# Altium PCB dimmer.PcbDoc
Units mm, origin at the board's own origin, x right, y up, seen from the top; angles counter-clockwise.
Board outline 32.8 x 86.9 mm, 4 copper layers (Top Layer, Layer 2, Layer 3, Bottom Layer), stack 1.369 mm thick; 54 components, 46 nets, 141 pads, 27 vias.
Unrouted connection lines stored in the file: 68.
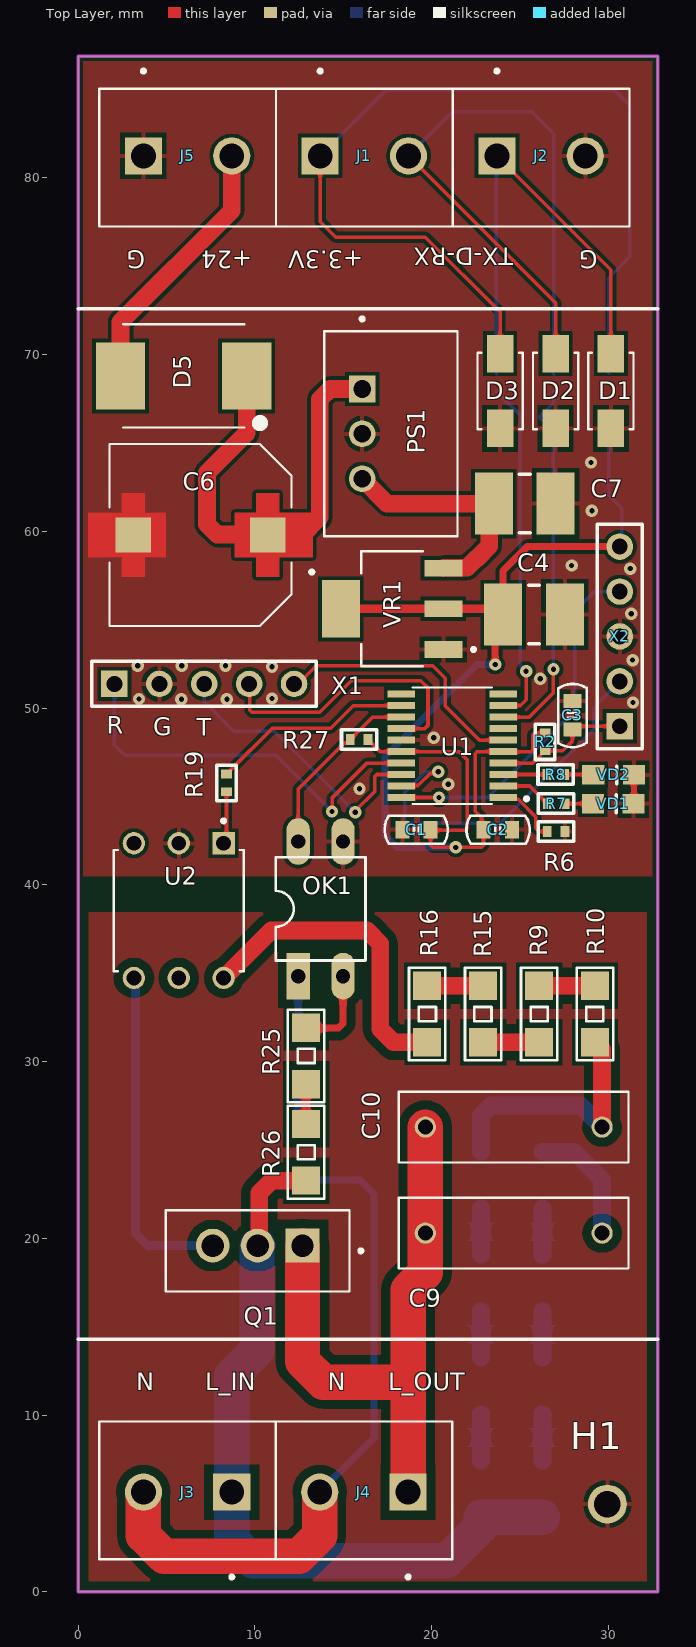
[diagram p0: Top Layer view]
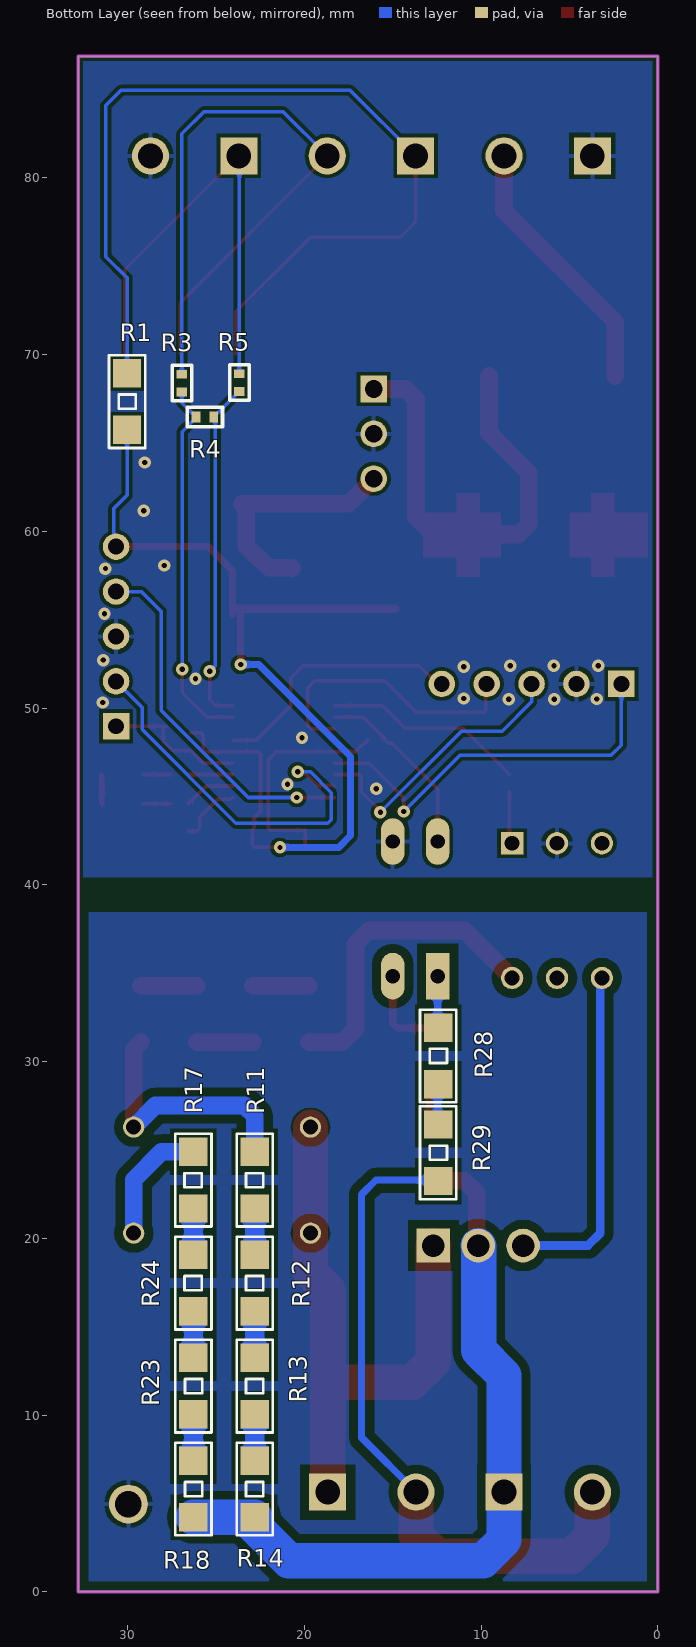
[diagram p1: Bottom Layer view, seen from below]
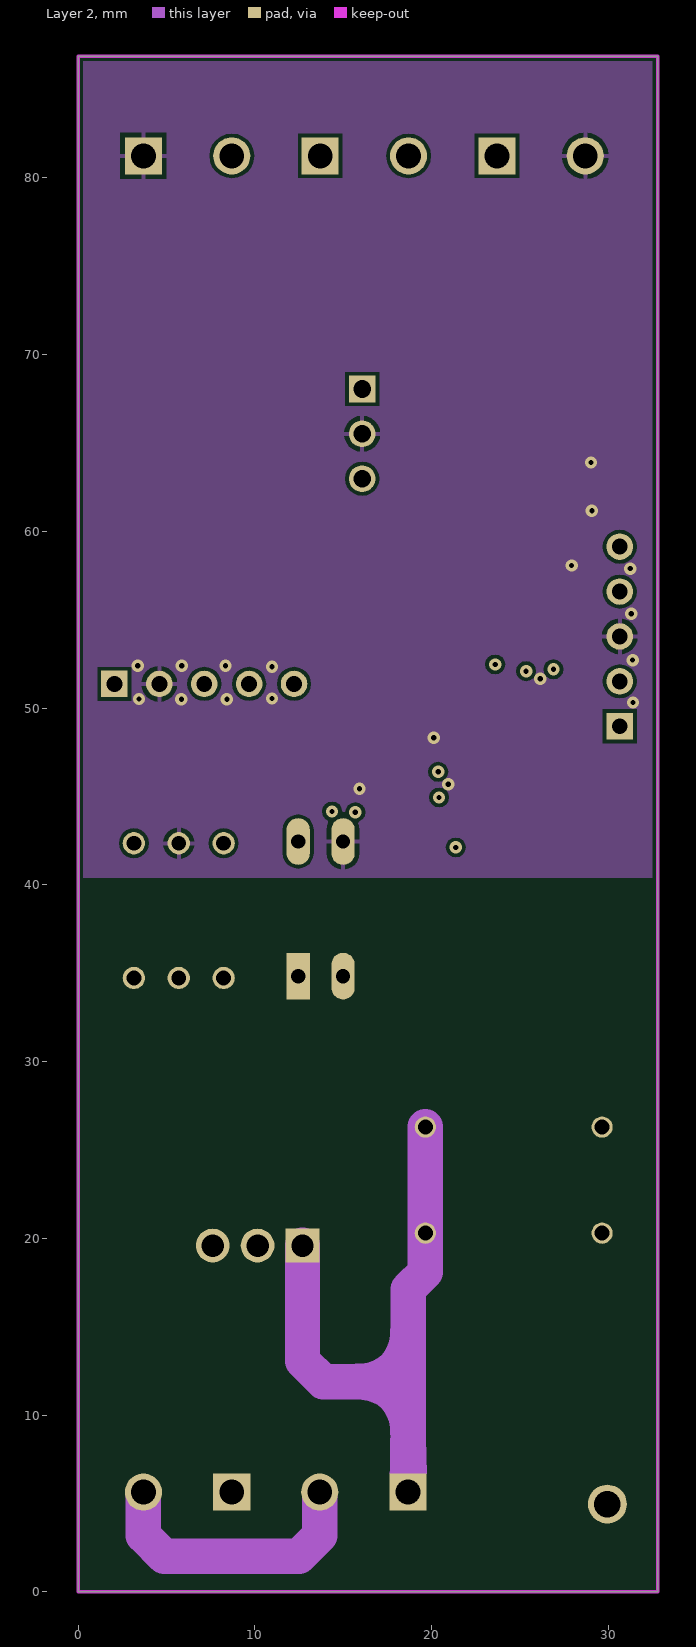
[diagram p2: Layer 2]
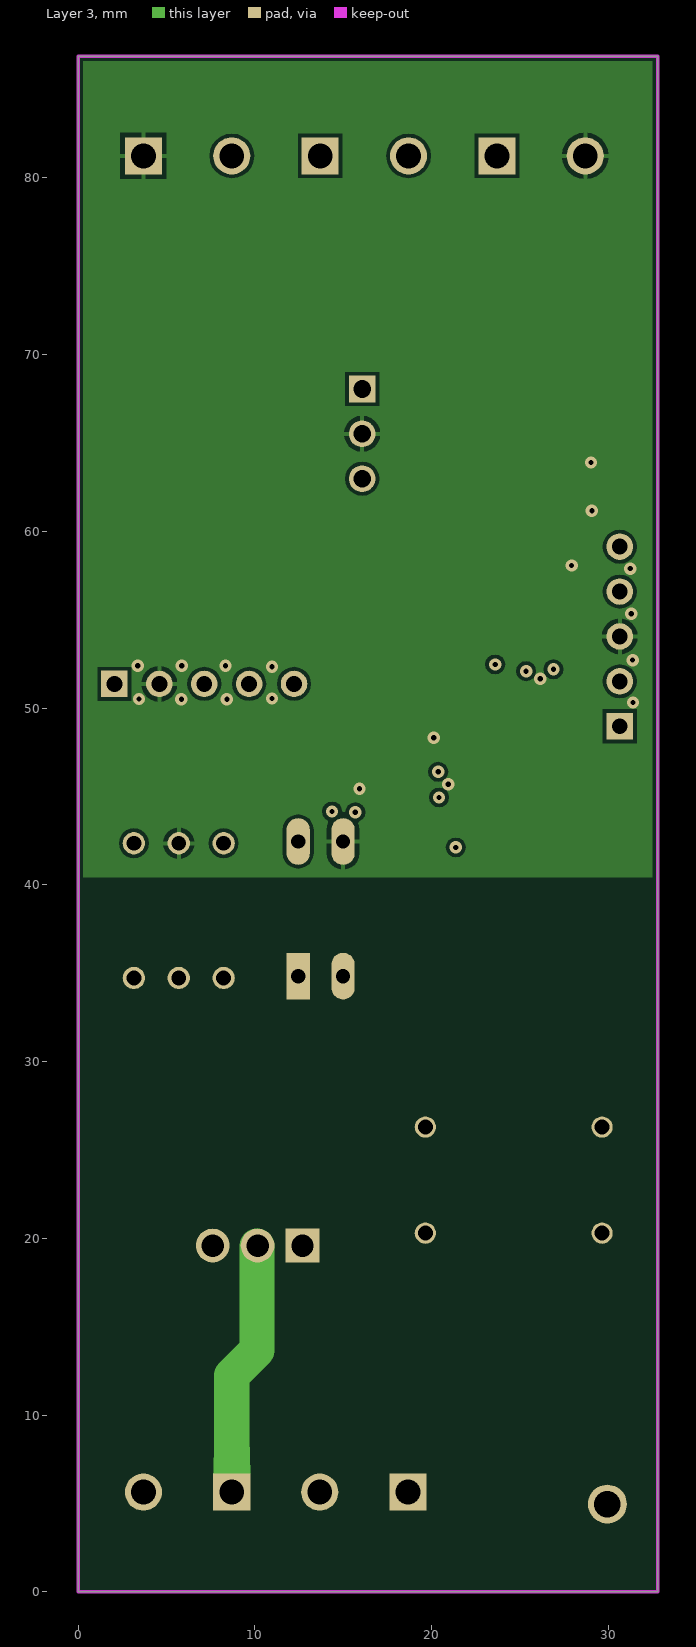
[diagram p3: Layer 3]

## Layer stack, top to bottom
Top Solder: solder mask 0.0254, SM-001, Dk 4
Top Layer: signal copper 0.035
Dielectric 1: prepreg 0.1295, PP-017, Dk 4.3
Dielectric 2: prepreg 0.1295, PP-017, Dk 4.3
Layer 2: signal copper 0.035
Dielectric 3: core 0.7112, Core-039, Dk 4.8
Layer 3: signal copper 0.035
Dielectric 4: prepreg 0.1295, PP-017, Dk 4.3
Dielectric 5: prepreg 0.1295, PP-017, Dk 4.3
Bottom Layer: signal copper 0.035
Bottom Solder: solder mask 0.0254, SM-001, Dk 4

## Board outline
0,0 0,86.9 32.8,86.9 32.8,0

## Design rules (kind name [scope] priority, off if disabled: settings)
Clearance Clearance_1 [InNet('pwr_gnd')] p1: gap=0.5 ignorepadtopadclearanceinfootprint=FALSE
Clearance [All] p2: gap=0.2 ignorepadtopadclearanceinfootprint=FALSE
ComponentClearance [InComponentClass('J*') vs InComponentClass('J*')] p1: gap=0.01 collisioncheckmode=3 verticalgap=0.01 showdistances=FALSE
DiffPairsRouting [All] p1: maxlimit=0.254 minlimit=0.2 mostfreqgap=0.254 toplayer_minwidth=0.25 toplayer_maxwidth=0.381 toplayer_prefwidth=0.381 midlayer1_minwidth=0.25 midlayer1_maxwidth=0.381 midlayer1_prefwidth=0.381 midlayer2_minwidth=0.25 midlayer2_maxwidth=0.381 midlayer2_prefwidth=0.381 bottomlayer_minwidth=0.25 bottomlayer_maxwidth=0.381 bottomlayer_prefwidth=0.381 maxuncoupledlength=12.7
HoleSize [All] p1: absolutevalues=TRUE maxlimit=5 minlimit=0.025 maxpercent=80.000 minpercent=20.000
MatchedLengths [InNetClass('RMII')] p1: tolerance=0.5 checknetsindiffpair=FALSE checkdiffpairvsdiffpair=TRUE checkxsignals=TRUE checkothers=TRUE
MinimumSolderMaskSliver [All] p1: minsoldermaskwidth=0
PolygonConnect [All] p1: connectstyle=Relief reliefconductorwidth=0.254 reliefentries=4 polygonreliefangle="90 Angle" airgapwidth=0.254
RoutingVias [All] p1: holewidth=0.3 width=1 viastyle="Through Hole" minholewidth=0.3 minwidth=0 maxholewidth=1 maxwidth=4
SilkToSolderMaskClearance [IsPad] p1: minsilkscreentomaskgap=0.1 clearancetoexposedcopper=TRUE
SolderMaskExpansion [All] p1: expansion=0.102 istentingtop=FALSE
UnRoutedNet [All] p1: checkbadconnections=TRUE
Width [All] p1: maxlimit=4 minlimit=0.15 preferedwidth=0.254
24 further rules are at their usual default settings.

## Components (designator, comment, footprint, x,y, rotation, side; value= is the part's Value field where it differs from the comment)
C1 "0603 0.1 uF" "CAPACITOR 0603" 19.95,43.125 r180 top
C2 "0603 0.1 uF" "CAPACITOR 0603" 22.95,43.125 r0 top
C3 "0603 0.1 uF" "CAPACITOR 0603" 27.975,50.4 r270 top
C4 "1812 4.7 uF" CAPCHIP1812 25.8,55.3 r0 top
C6 "470µF 35V" CAP_EEEFK1V471SV 6.925,59.8 r180 top
C7 "1812 4.7 uF" CAPCHIP1812 25.275,61.575 r180 top
C9 "0.01" CAPRR1000W60L1300T400H900 24.65,20.3 r0 top
C10 "0.047" CAPRR1000W60L1300T400H900 24.65,26.3 r180 top
D1 "SMAJ36CA" DIOM4325X250N 30.15,67.95 r270 top
D2 "SMAJ36CA" DIOM4325X250N 27.025,67.95 r270 top
D3 "SMAJ36CA" DIOM4325X250N 23.878,67.95 r270 top
D5 "MBRS540T3G" DIOM7958X213N 5.975,68.8 r180 top
H1 "Hole" "Hole 1.5" 29.95,4.975 r0 top
J1 "KLS2-128I-5.00-02P-4S" CUI_TB003-500-P02BE 13.7,81.25 r0 top
J2 "KLS2-128I-5.00-02P-4S" CUI_TB003-500-P02BE 23.7,81.25 r0 top
J3 "KLS2-128I-5.00-02P-4S" CUI_TB003-500-P02BE 8.7,5.65 r180 top
J4 "KLS2-128I-5.00-02P-4S" CUI_TB003-500-P02BE 18.675,5.65 r180 top
J5 "KLS2-128I-5.00-02P-4S" CUI_TB003-500-P02BE 3.7,81.25 r0 top
OK1 "PC814" DIL04 13.725,38.65 r0 top
PS1 "K7805-500R3" CONV_K7805-500R3 17.7,65.525 r270 top
Q1 "BTA06-600BRG" TO254P1040X460X1975-3 12.7,19.6 r180 top
R1 "1206 10 R" "Resistor 1206" 30.025,68.95 r270 bottom
R2 "0402 10K" "Resistor 0402" 26.425,47.6 r90 top
R3 "0402 10 R" "Resistor 0402" 26.925,68.9 r270 bottom
R4 "0402 0" "Resistor 0402" 26.125,66.475 r180 bottom
R5 "0402 10 R" "Resistor 0402" 23.675,68.925 r270 bottom
R6 "0402 10K" "Resistor 0402" 26.55,43.025 r0 top
R7 "0402 3K" "Resistor 0402" 26.55,44.6 r0 top
R8 "0402 3K" "Resistor 0402" 26.525,46.25 r0 top
R9 "1206 47 R" "Resistor 1206" 26.083,34.3 r270 top
R10 "1206 47 R" "Resistor 1206" 29.25,31.1 r90 top
R11 "1206 169 R" "Resistor 1206" 22.8,21.7 r90 bottom
R12 "1206 169 R" "Resistor 1206" 22.8,15.875 r90 bottom
R13 "1206 169 R" "Resistor 1206" 22.8,10.05 r90 bottom
R14 "1206 169 R" "Resistor 1206" 22.8,4.225 r90 bottom
R15 "1206 47 R" "Resistor 1206" 22.917,31.1 r90 top
R16 "1206 47 R" "Resistor 1206" 19.75,34.3 r270 top
R17 "1206 10 R" "Resistor 1206" 26.275,21.7 r90 bottom
R18 "1206 10 R" "Resistor 1206" 26.275,7.425 r270 bottom
R19 "0402 430 R" "Resistor 0402" 8.4,45.275 r90 top
R23 "1206 10 R" "Resistor 1206" 26.275,13.25 r270 bottom
R24 "1206 10 R" "Resistor 1206" 26.275,15.875 r90 bottom
R25 "1206 36k" "Resistor 1206" 12.9,31.925 r270 top
R26 "1206 36k" "Resistor 1206" 12.9,26.475 r270 top
R27 "0402 10K" "Resistor 0402" 15.406,48.231 r0 top
R28 "1206 36k" "Resistor 1206" 12.425,31.925 r270 bottom
R29 "1206 36k" "Resistor 1206" 12.425,26.45 r270 bottom
U1 "STM32F030F4P6" SOP65P640X120-20N 21.175,47.875 r180 top
U2 "MOC3023" DIP762W48P254L889H508Q6 5.7,38.55 r270 top
VD1 "0805 G" 0805- 29.125,44.6 r0 top
VD2 "0805 G" 0805- 29.15,46.225 r0 top
VR1 "LM1117MPX-3.3" VREG_LM1117MPX-3.3 17.775,55.625 r180 top
X1 "PLS-5 2.54" PLS-5-3D 2.06,51.375 r0 top
X2 "PLS-5 2.54" PLS-5-3D 30.65,48.98 r90 top

## Footprints (in the part's own frame and the unit in brackets; to place one, negate y for a bottom-side part, rotate by r counter-clockwise, add the part's x,y. Pads: shape width x height; smd on the part's side, far side on the other; paste and mask are expansions set on the pad)
0805- [mm]
  rect 1.25x1.1 smd mask+0.06: A(0,0) K(2.3,0)
  silkscreen extent 1.33,-0.5 1.33,0.5, body extent 0.12,-0.62 2.14,0.63, height 1.1
CAP_EEEFK1V471SV [mm]
  rect 2x2 smd paste-2 mask+0: 1(-3.8,0) 2(3.8,0)
  Top Layer region: -3.15,1.25 -1.95,1.25 -1.95,-1.25 -3.15,-1.25 -3.15,-2.35 -4.45,-2.35 -4.45,-1.25 -6.35,-1.25 -6.35,1.25 -4.45,1.25 -4.45,2.35 -3.15,2.35
  Top Layer region: 4.45,1.25 6.35,1.25 6.35,-1.25 4.45,-1.25 4.45,-2.35 3.15,-2.35 3.15,-1.25 1.95,-1.25 1.95,1.25 3.15,1.25 3.15,2.35 4.45,2.35
  silkscreen extent -6.4,-5.15 5.15,5.15, body extent -5.85,-5.15 5.85,5.15, height 9.5
"CAPACITOR 0603" [mm]
  rect 0.8x1 smd: 1(0,0) 2(1.6,0)
  silkscreen extent -0.97,-0.8 2.6,0.8, body extent -0.01,-0.38 1.64,0.42, height 0.81
CAPCHIP1812 [mm] "Chip Capacitor, 2-Leads, Body 4,50x3,20mm,"
  rect 2.15x3.5 smd mask+0.06: 1(-1.75,0) 2(1.75,0)
  silkscreen extent -0.3,-1.65 0.3,1.65, body extent -2.25,-1.6 2.25,1.6, height 1
CAPRR1000W60L1300T400H900 [mm]
  round 1.2 hole 0.85: 1(-5,0) 2(5,0)
  silkscreen extent -6.5,-2 6.5,2, body extent -6.5,-2.03 6.5,1.97, height 7
CONV_K7805-500R3 [mm]
  rect 1.508x1.508 hole 1: 1(-2.54,-1.625)
  round 1.508 hole 1: 2(0,-1.625) 3(2.54,-1.625)
  silkscreen extent -6.6,-3.77 5.8,3.77, body extent -5.8,-3.77 5.8,3.77, height 10.16
CUI_TB003-500-P02BE [mm]
  rect 2.1x2.1 hole 1.4: 1(0,0)
  round 2.1 hole 1.4: 2(5,0)
  silkscreen extent -2.5,-4 7.5,4.9
DIL04 [mil]
  rect 52x104 hole 32: 1(-50,-150)
  oval 52x104 hole 32: 2(50,-150) 3(50,150) 4(-50,150)
  silkscreen extent -100,-115 100,115
DIOM4325X250N [mm]
  rect 2.12x1.5 smd: 1(-2.115,0) 2(2.115,0)
  silkscreen extent -2.16,-1.28 2.16,1.28
DIOM7958X213N [mil]
  rect 110x150 smd: A(140.49,0) C(-140.49,0)
  silkscreen extent -176,-115 135,115
DIP762W48P254L889H508Q6 [mm]
  rect 1.26x1.26 / inner round 1.26 / far side rect 1.26x1.26 hole 0.84: 1(-3.81,2.54)
  round 1.26 hole 0.84: 2(-3.81,0) 3(-3.81,-2.54) 4(3.81,-2.54) 5(3.81,0) 6(3.81,2.54)
  silkscreen extent -5.18,-3.68 3.43,3.68, body extent -4.4,-3.56 4.4,3.56, height 4.8
"Hole 1.5" [mm]
  round 2.2 hole 1.5: 0(0,0)
PLS-5-3D [mm] "Connector; Header; 5 Position"
  rect 1.5x1.5 hole 0.9: 1(0,0)
  round 1.5 hole 0.9: 2(2.54,0) 3(5.08,0) 4(7.62,0) 5(10.16,0)
  silkscreen extent -1.27,-1.27 11.43,1.27, body extent -1.27,-1.27 11.43,1.27, height 8.44
"Resistor 0402" [mm]
  rect 0.5x0.6 smd: 1(0,0) 2(1,0)
  silkscreen extent -0.5,-0.55 1.5,0.55, body extent 0,-0.28 1,0.27, height 0.46
"Resistor 1206" [mm]
  rect 1.6x1.6 smd: 1(0,0) 2(3.2,0)
  silkscreen extent -1.02,-1.02 4.23,1.02, body extent -0.03,-0.79 3.4,0.8, height 0.5
SOP65P640X120-20N [mm]
  rect 1.56x0.41 smd: 1(-2.88,2.925) 2(-2.88,2.275) 3(-2.88,1.625) 4(-2.88,0.975) 5(-2.88,0.325) 6(-2.88,-0.325) 7(-2.88,-0.975) 8(-2.88,-1.625) 9(-2.88,-2.275) 10(-2.88,-2.925) 11(2.88,-2.925) 12(2.88,-2.275) 13(2.88,-1.625) 14(2.88,-0.975) 15(2.88,-0.325) 16(2.88,0.325) 17(2.88,0.975) 18(2.88,1.625) 19(2.88,2.275) 20(2.88,2.925)
  silkscreen extent -4.3,-3.3 2.25,3.3, body extent -3.2,-3.25 3.2,3.25, height 1.18
TO254P1040X460X1975-3 [mm]
  rect 1.91x1.91 hole 1.27: 1(0,0)
  round 1.91 hole 1.27: 2(2.54,0) 3(5.08,0)
  silkscreen extent -3.4,-2 7.74,2.6
VREG_LM1117MPX-3.3 [mm]
  rect 2.15x0.95 smd: 1(-2.9,2.3) 2(-2.9,0) 3(-2.9,-2.3)
  rect 2.15x3.25 smd: 4(2.9,0)
  silkscreen extent -4.7,-3.25 1.75,3.25, body extent -3.5,-3.25 3.5,3.25, height 1.8

## Part data
C1 C2 C3: library part Capasitor, "Ceramic Capacitor", Package=0603
C4 C7: library part "Cap C", "Ceramic Capacitor", Nominal_voltage_V={Nominal_voltage_V}, Package=1812, Tolerance_Percent={Tolerance_Percent}, Body={Body}, Class="Электронные компоненты", Installation={Installation}, Ordering_Information={Ordering_Information}, Pins={Pins}, SubClass=Конденсаторы, TKE={TKE}
C6: library part EEEFK1V471SV, "EEEFK1V471SV 470µF 35V Aluminum Electrolytic Capacitors Radial, Can - SMD 80mOhm @ 100kHz 2000 Hrs @ 105°C", Package="RADIAL-2 Panasonic", Availability="In Stock", Check_prices=https://www.snapeda.com/parts/EEE-FK1V471SV/Panasonic/view-part/?ref=eda, MF="Panasonic Electronic Components", MP=EEE-FK1V471SV, Price=None, Purchase-URL=https://pricing.snapeda.com/search/part/EEE-FK1V471SV/?ref=eda, SnapEDA_Link=https://www.snapeda.com/parts/EEE-FK1V471SV/Panasonic/view-part/?ref=snap
C9 C10: library part HV_CAP
D1 D2 D3: Package=None, Availability=Unavailable, MP=SMAJ36CA, Price=None
D5: "Diode Schottky 40V 5A Surface Mount SMC", Package="DO-214 ON Semiconductor", Availability=Unavailable, MF="ON Semiconductor", MP=MBRS540T3G, Price=None, SnapEDA_Link=https://www.snapeda.com/parts/MBRS540T3G/ON%20Semiconductor/view-part/78777/?ref=snap
J1 J2 J3 J4 J5: library part TB003-500-P02BE, "2~24 Poles, Screw Type, Horizontal, 5.0 Pitch, 26~14 _AWG_, Terminal Block Connector", Package=None, Availability=Unavailable, MF="CUI Devices", MP=TB003-500-P02BE, Price=None, SnapEDA_Link=https://www.snapeda.com/parts/TB003-500-P02BE/CUI%20Devices/view-part/3590637/?ref=snap
OK1: "#10-32 Round Head Machine Screw Slotted Drive Nylon", Package="DIP-4 Sharp", Availability=Unavailable, MF="Essentra Components", MP=PC814, Price=None, SnapEDA_Link=https://www.snapeda.com/parts/PC814/Essentra%20Components/view-part/624045/?ref=snap
PS1: "Linear Regulator Replacement DC DC Converter 1 Output 5V, -5V - - - 500mA, 300mA 6.5V, 7V - 36V, 31V Input", Package="SIP-3-3 MORNSUN", Availability="In Stock", Check_prices=https://www.snapeda.com/parts/K7805-500R3/MORNSUN/view-part/?ref=eda, MF=MORNSUN, MP=K7805-500R3, Price=None, Purchase-URL=https://pricing.snapeda.com/search/part/K7805-500R3/?ref=eda, SnapEDA_Link=https://www.snapeda.com/parts/K7805-500R3/MORNSUN/view-part/?ref=snap
Q1: "TRIAC Standard 600V 6A Through Hole TO-220AB", Package="TO-220 STMicroelectronics", Availability=Unavailable, MF=STMicroelectronics, MP=BTA06-600BRG, Price=None, SnapEDA_Link=https://www.snapeda.com/parts/BTA06-600BRG/STMicroelectronics/view-part/107180/?ref=snap
R1 R9 R10 R11 R12 R13 R14 R15 R16 R17 R18 R23 R24 R25 R26 R28 R29: library part Resistor, "Resistor", Package=1206
R2 R3 R4 R5 R6 R7 R8 R19 R27: library part Resistor, "Resistor", Package=0402
U1: "MCU 32-bit STM32F ARM Cortex M0 RISC 16KB Flash 2.5V/3.3V 20-Pin TSSOP Tray", Package=None, Availability=Unavailable, MP=STM32F030F4P6, Price=None
U2: "Optoisolator Triac Output 5300Vrms 1 Channel 6-DIP", Package="DIP-6 Texas Instruments", Availability="In Stock", Check_prices=https://www.snapeda.com/parts/MOC3023/Onsemi/view-part/?ref=eda, MF="ON Semiconductor", MP=MOC3023, Price=None, Purchase-URL=https://pricing.snapeda.com/search/part/MOC3023/?ref=eda, SnapEDA_Link=https://www.snapeda.com/parts/MOC3023/Onsemi/view-part/?ref=snap
VD1 VD2: library part "LED SMD", "Green", Package=0805, CompType=LED, Note=Read, Pins=2
VR1: "800-mA 3.3-V linear voltage regulator", Package="SOT-223-4 Texas Instruments", Availability="In Stock", Check_prices=https://www.snapeda.com/parts/LM1117MPX-3.3/Texas+Instruments/view-part/?ref=eda, MF="Texas Instruments", MP=LM1117MPX-3.3, Price=None, Purchase-URL=https://pricing.snapeda.com/search/part/LM1117MPX-3.3/?ref=eda, SnapEDA_Link=https://www.snapeda.com/parts/LM1117MPX-3.3/Texas+Instruments/view-part/?ref=snap
X1 X2: library part PLS-5, "Header, 5-Pin", Package="2.54 x 5", CompType=connector, Note="header pins 2.54mm x 5", PartNumber=PLS-5, Pins=5

## Via types
v1: diameter 0.7, hole 0.3, Top Layer to Bottom Layer, tented both sides, 27 vias

## Nets (pads, with @x,y where several pads share a name; then routed paths per layer and width w, separated by ;. In a path a pad name is that pad's centre, name@x,y a point inside that pad or via, vN(x,y) a via of type N, cw(c..) or ccw(c..) an arc to the next point about the centre after c; other vN are vias at no path point)
+3.3v: C1.1 C2.1 C4.1 R1.2 R2.2 R27.2 U1.5 U1.16 VR1.2 VR1.4 X2.5 | length 72.2
  Top Layer w0.2: R27.2 16.406,48.181 16.556,48.031 16.606,48.031 17.087,47.55 U1.16 21.55,47.55 22.025,47.075 22.025,43.217 21.908,43.1 19.975,43.1 C1.1 19.95,42.242 20.067,42.125 v1(21.375,42.125) 22.833,42.125 22.95,42.242 C2.1 22.842,43.233 22.842,43.808 22.475,44.175 22.475,47.433 22.592,47.55 U1.5 24.08,47.525 25.608,47.525 25.725,47.642 25.725,48.483 25.842,48.6 R2.2
  Top Layer w0.4: v1(23.6,52.475) 23.6,55.5 C4.1@23.725,55.625 ; C4.1 24.05,57.775 25.415,59.14 X2.5
  Top Layer w0.5: VR1.4 VR1.2 C4.1@23.725,55.625
  Bottom Layer w0.2: R1.2 30.025,62.05 30.775,61.3 30.775,59.265 X2.5
  Bottom Layer w0.4: v1(21.375,42.125) 18.05,42.125 17.375,42.8 17.375,47.275 22.575,52.475 v1(23.6,52.475)
+5v: C7.2 PS1.3 VR1.3 | length 13.7
  Top Layer w1: PS1.3 17.485,61.575 C7.2 23.275,61.325 23.275,59.175 22.575,58.475 22.535,58.475 22.01,57.95 20.7,57.95 VR1.3
+24v: C6.1 D5.C PS1.1 | length 25.7
  Top Layer w1: D5.C 9.543,65.568 7.3,63.325 7.3,60.411 7.886,59.825 10.7,59.825 C6.1 12.675,59.8 13.675,60.8 13.675,67.479 14.261,68.065 PS1.1
B1: U1.14 X1.4 | length 16.2
  Top Layer w0.2: X1.4 9.725,51.33 9.725,49.892 9.842,49.775 13.675,49.775 15.45,51.55 19.4,51.55 19.8,51.15 19.8,49.025 19.625,48.85 U1.14
B2: U1.6 X1.5 | length 14.9
  Top Layer w0.2: X1.5 12.462,51.375 13.487,52.4 20.075,52.4 20.775,51.7 20.775,50.125 22.7,48.2 U1.6
CTR: R19.2 U1.12 | length 11.5
  Top Layer w0.2: R19.2 8.45,46.275 8.6,46.425 8.6,46.475 11,48.875 14.3,48.875 15.575,50.15 U1.12
GND: C1.2 C2.2 C3.1 C4.2 C6.2 C7.1 D1.2 D2.2 D3.2 J2.2 J5.1 OK1.3 PS1.2 R6.2 U1.15 U2.2 VD1.K VD2.K VR1.1 X1.2 X2.3 | length 1.6
  Top Layer w0.3: VD1.K 31.45,44.625 VD2.K
  other v1: 15.925,45.45 20.95,45.7 20.125,48.325 31.4,50.325 5.85,50.5 8.425,50.5 3.45,50.525 10.975,50.55 26.15,51.675 10.975,52.35 3.375,52.4 5.875,52.4 8.341,52.401 31.375,52.725 31.3,55.35 31.25,57.9 27.925,58.075 29.075,61.175 29.025,63.9
L: J3.1 Q1.2 R14.1 R18.2 R26.2 | length 57.1
  Top Layer w1: Q1.2 10.25,19.69 10.25,22.575 10.95,23.275 R26.2
  Layer 3 w2: J3.1 8.7,12.25 10.125,13.675 Q1.2@10.125,19.565
  Bottom Layer w2: Q1.2 10.125,19.565 10.125,13.675 8.7,12.25 J3.1 8.7,2.947 9.872,1.775 20.875,1.775 22.8,3.7 R14.1 R18.2
M1_BOOT: R6.1 U1.1 | length 3.7
  Top Layer w0.2: U1.1 24.16,44.845 24.905,44.845 25.9,43.85 25.9,43.225 26.1,43.025 R6.1
M1_LED: R7.1 U1.2 | length 2.9
  Top Layer w0.2: U1.2 25.55,45.6 26.35,44.8 26.4,44.8 26.55,44.65 R7.1
M1_LED1: R8.1 U1.3 | length 2.5
  Top Layer w0.2: U1.3 R8.1
M1_NRST: C3.2 R2.1 U1.4 X2.1 | length 7.9
  Top Layer w0.2: U1.4 25.725,46.9 R2.1 27.425,47.6 27.975,48.15 C3.2 ; C3.2@27.805,48.98 X2.1
M1_SWCLK: U1.20 X2.4 | length 20.5
  Top Layer w0.2: U1.20 v1(20.425,44.95)
  Bottom Layer w0.2: v1(20.425,44.95) 23.175,44.95 28.1,49.875 28.1,55.475 29.225,56.6 X2.4
M1_SWDIO: U1.19 X2.2 | length 22.6
  Top Layer w0.2: U1.19 18.328,45.633 19.258,45.633 19.94,46.315 20.29,46.315 v1(20.375,46.4)
  Bottom Layer w0.2: v1(20.375,46.4) 19.65,46.4 18.475,45.225 18.475,43.7 18.675,43.5 23.875,43.5 29.175,48.8 29.175,50.045 X2.2
N: J3.2 J4.2 R29.2 | length 54.5
  Top Layer w2: J3.2 3.7,3.197 4.872,2.025 12.503,2.025 13.675,3.197 J4.2
  Layer 2 w2: J3.2 3.7,3.197 4.872,2.025 12.503,2.025 13.675,3.197 J4.2
  Bottom Layer w0.4: R29.2@12.425,23.3 15.95,23.3 16.75,22.5 16.75,8.725 J4.2
NetC9_1: C9.1 C10.2 J4.1 Q1.1 | length 68.8
  Top Layer w0.4: C10.2@19.088,26.453 19.497,26.453 C10.2
  Top Layer w2: Q1.1 12.7,13.047 13.872,11.875 18.675,11.875 ; J4.1 18.675,11.875 ; C10.2 C9.1 19.65,18.075 18.675,17.1 18.675,11.875
  Layer 2 w2: Q1.1@12.7,19.625 Q1.1 12.7,13.072 13.872,11.9 18.675,11.9 ; J4.1@18.675,5.675 18.675,11.9 ; C10.2@19.65,26.325 C10.2 19.65,20.325 C9.1 19.65,18.1 18.675,17.125 18.675,11.9
NetC9_2: C9.2 R17.2 | length 7.1
  Bottom Layer w1: R17.2 28.075,24.9 29.65,23.325 C9.2
NetC10_1: C10.1 R10.1 R11.2 | length 14.6
  Top Layer w1: R10.1 29.65,30.7 C10.1
  Bottom Layer w1: R11.2 22.8,26.939 23.386,27.525 28.425,27.525 C10.1
NetD1_1: D1.1 J2.1 R5.1 | length 26.2
  Top Layer w0.2: J2.1 30.15,74.8 D1.1
  Bottom Layer w0.2: R5.1 23.675,81.225 J2.1
NetD2_1: D2.1 J1.2 R3.1 | length 38
  Top Layer w0.2: J1.2 27.025,72.925 D2.1
  Bottom Layer w0.2: J1.2 21.2,83.75 25.675,83.75 26.925,82.5 R3.1
NetD3_1: D3.1 J1.1 R1.1 | length 53.5
  Top Layer w0.2: J1.1 13.7,77.525 14.575,76.65 19.65,76.65 23.878,72.422 D3.1
  Bottom Layer w0.2: J1.1 17.425,84.975 30.35,84.975 31.225,84.1 31.225,75.55 30.025,74.35 R1.1
NetD5_A: D5.A J5.2 | length 15.1
  Top Layer w1: D5.A 2.407,71.857 8.7,78.15 J5.2
NetOK1_1: OK1.1 R28.1 | length 3
  Bottom Layer w0.4: OK1.1 12.455,32.395 R28.1@12.875,31.975
NetOK1_2: OK1.2 R25.1 | length 4.9
  Top Layer w0.4: R25.1 12.925,31.9 14.725,31.9 14.995,32.17 OK1.2
NetQ1_3: Q1.3 U2.4 | length 19.1
  Bottom Layer w0.5: U2.4 3.25,34.65 3.25,20.3 3.95,19.6 Q1.3
NetR7_2: R7.2 VD1.A | length 1.6
  Top Layer w0.2: R7.2 VD1.A
NetR8_2: R8.2 VD2.A | length 1.6
  Top Layer w0.2: R8.2 29.125,46.25 VD2.A
NetR9_1: R9.1 R10.2 | length 3.2
  Top Layer w1: R9.1 R10.2
NetR9_2: R9.2 R15.1 | length 3.2
  Top Layer w1: R15.1 R9.2
NetR11_1: R11.1 R12.2 | length 2.6
  Bottom Layer w1: R12.2 R11.1
NetR12_1: R12.1 R13.2 | length 2.6
  Bottom Layer w1: R13.2 R12.1
NetR13_1: R13.1 R14.2 | length 2.6
  Bottom Layer w1: R14.2 R13.1
NetR15_2: R15.2 R16.1 | length 3.2
  Top Layer w1: R16.1 R15.2
NetR16_2: R16.2 U2.6 | length 18.1
  Top Layer w1: U2.6 10.925,37.425 16.35,37.425 17.1,36.675 17.1,31.85 17.85,31.1 R16.2
NetR17_1: R17.1 R24.2 | length 2.6
  Bottom Layer w1: R24.2 R17.1
NetR18_1: R18.1 R23.2 | length 2.6
  Bottom Layer w1: R18.1 R23.2
NetR19_1: R19.1 U2.1 | length 3
  Top Layer w0.2: U2.1 8.4,42.52 R19.1
NetR23_1: R23.1 R24.1 | length 2.6
  Bottom Layer w1: R23.1 R24.1
NetR25_2: R25.2 R26.1 | length 2.3
  Top Layer w0.4: R26.1 R25.2
NetR28_2: R28.2 R29.1 | length 2.3
  Bottom Layer w0.4: R29.1 12.45,26.475 12.45,28.7 R28.2
pwr_gnd: H1.0
RX: R4.2 R5.2 U1.9 | length 19.7
  Top Layer w0.2: U1.9 25.025,50.15 25.35,50.475 v1(25.35,52.1)
  Bottom Layer w0.2: R5.2 23.725,67.925 23.875,67.775 23.875,67.725 24.925,66.675 24.975,66.675 25.125,66.525 R4.2 25.025,66.375 25.025,52.425 v1(25.35,52.1)
RX_BUS: U1.18 X1.3 | length 16.2
  Top Layer w0.2: v1(15.691,44.111) 15.691,44.191 16.775,45.275 16.775,46.133 16.892,46.25 U1.18
  Bottom Layer w0.2: X1.3 7.14,50.36 8.8,48.7 11.102,48.7 v1(15.691,44.111)
TX: R3.2 R4.1 U1.8 | length 21.1
  Top Layer w0.2: U1.8 25.525,49.5 26.9,50.875 v1(26.9,52.2)
  Bottom Layer w0.2: v1(26.9,52.2) 26.9,65.65 26.125,66.425 R4.1 26.125,66.525 26.275,66.675 26.325,66.675 26.925,67.275 R3.2
TX_BUS: U1.17 X1.1 | length 22.8
  Top Layer w0.2: v1(14.371,44.157) 14.371,44.921 16.35,46.9 U1.17
  Bottom Layer w0.2: X1.1 2.06,47.915 2.625,47.35 11.178,47.35 v1(14.371,44.157)
Zc_INT: OK1.4 R27.1 U1.13 | length 10.5
  Top Layer w0.2: OK1.4 12.455,45.43 15.056,48.031 15.256,48.031 15.406,48.181 R27.1 15.913,48.737 16.675,49.5 U1.13
pads on no net: U1.7 U1.10 U1.11 U2.3 U2.5

## Polygon pours and split planes (outlines as drawn)
pwr_gnd on Bottom Layer "GND" (solid, remove dead copper, pour order 5): 0,0 0,38.45 32.8,38.45 32.8,0
GND on Bottom Layer "GND" (solid, pour order 0): 0,40.45 32.8,40.45 32.8,86.9 0,86.9
GND on Layer 2 "GND" (solid, pour order 2): 0,40.4 32.8,40.4 32.8,86.9 0,86.9
GND on Layer 3 "GND" (solid, pour order 1): 0,40.45 32.8,40.45 32.8,86.9 0,86.9
pwr_gnd on Top Layer "GND" (solid, remove dead copper, pour order 4): 0,0 0,38.45 32.8,38.45 32.8,0
GND on Top Layer "GND" (solid, remove dead copper, pour order 3): 0,40.5 32.8,40.5 32.8,86.9 0,86.9

## Keep-outs
Keep-Out Layer:
  the board outline again, w0.2

## Silkscreen, mask and mechanical layers (free items; w line width, h text height)
Top Overlay:
  lines w0.2: 0,14.3 32.8,14.3 ; 0,72.6 32.8,72.6
  text "TX-D-RX" at 24.621,76.046 h1 r180
  text "G" at 3.796,75.896 h1 r180
  text "+24" at 9.846,75.896 h1 r180
  text "+3.3V" at 16.146,75.896 h1 r180
  text "G" at 29.396,75.896 h1 r180
  text "R" at 1.629,48.554 h1
  text "G" at 4.254,48.479 h1
  text "T" at 6.729,48.454 h1
  text "N" at 3.304,11.404 h1
  text "L_IN" at 7.204,11.404 h1
  text "N" at 14.129,11.404 h1
  text "L_OUT" at 17.554,11.404 h1